# EAGLE board Control Card Layout #6 (EAGLE 7.6.0)
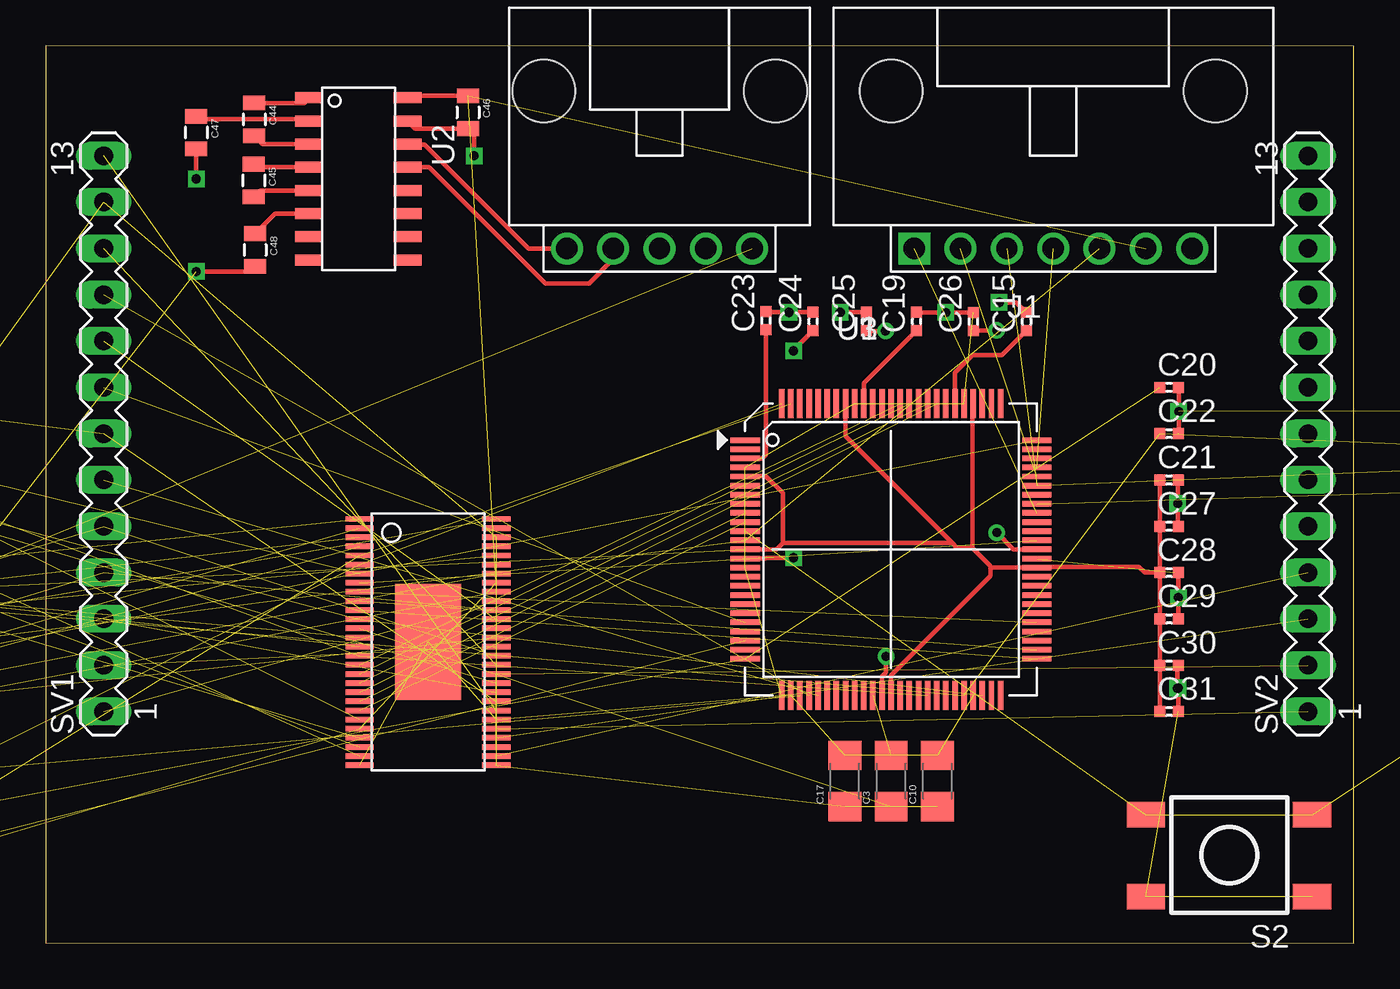
[diagram p0: board, top side]
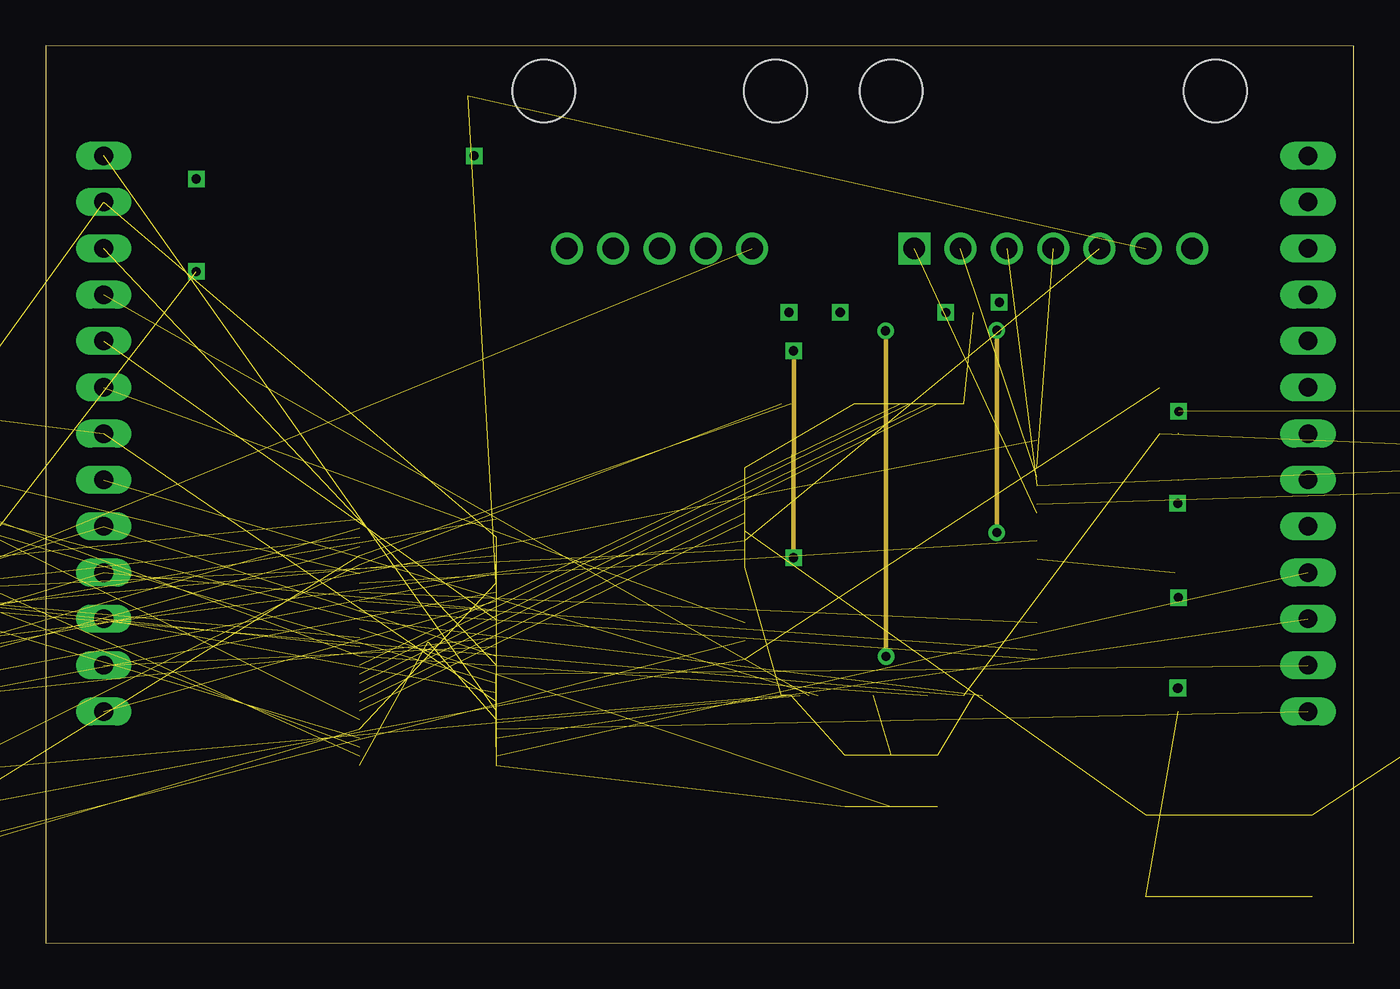
[diagram p1: board, inner layer Top_Mid]
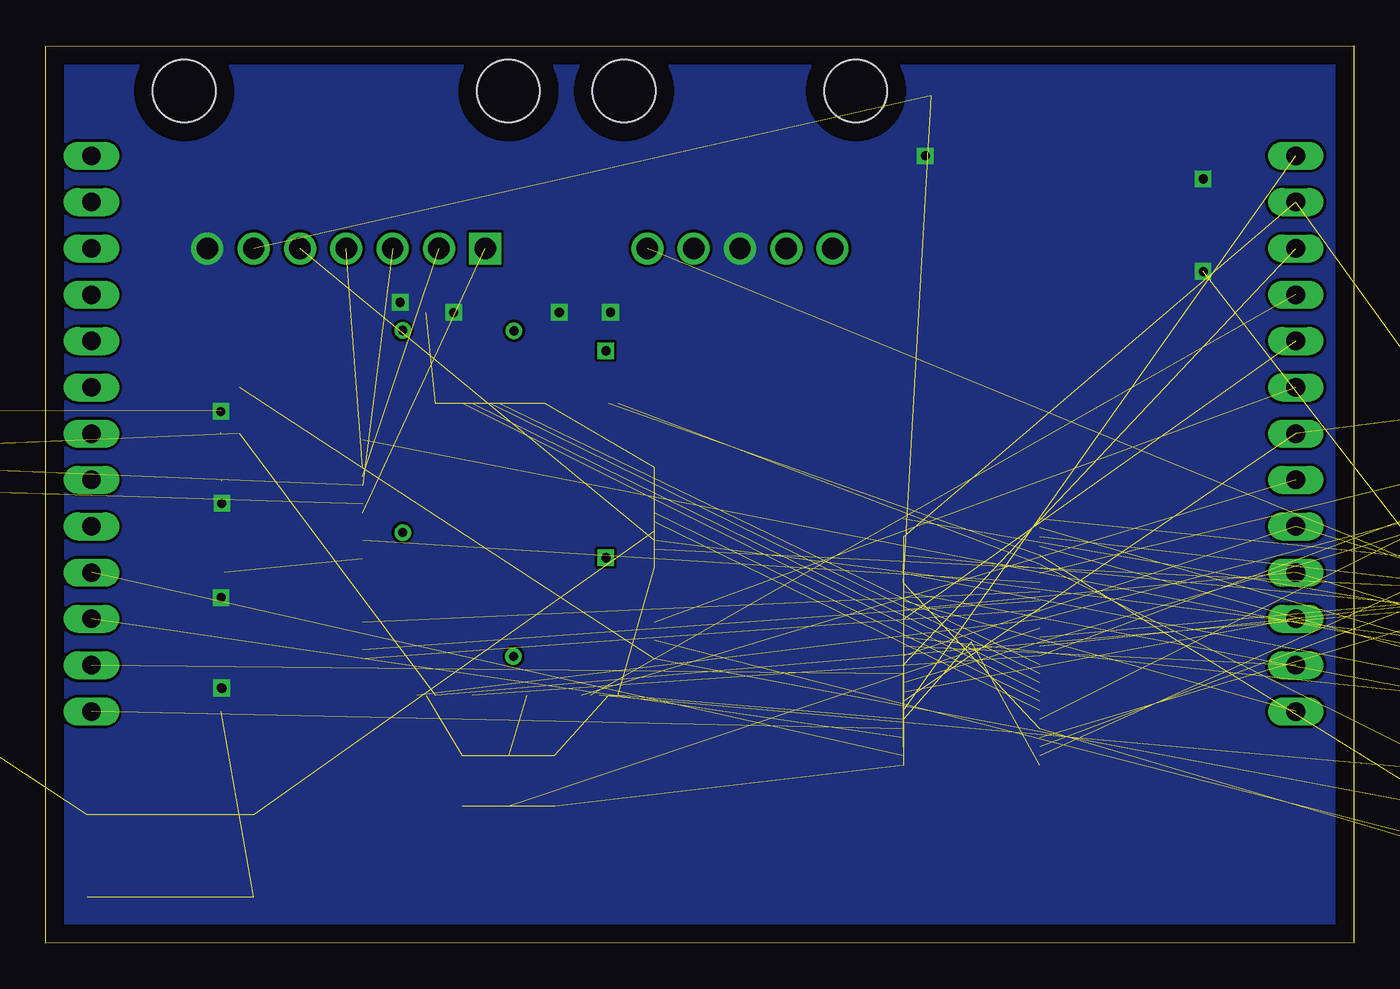
[diagram p2: board, bottom side, seen from below]

Size 71.75 x 49.23 mm. Coordinates in mm from the lower left corner, seen from the top.
Outline: 0,0.02 71.75,0 71.75,49.2 0,49.23 0,0.02
Copper layers (1*2*15*16): Top 0.035mm / dielectric 1.5mm / Top_Mid 0.035mm / dielectric 0.15mm / Bottom_Mid 0.035mm / dielectric 0.2mm / Bottom 0.035mm
Design rules "advanced_circuits_standard *": minimum track width 5mil, minimum drill 10mil, track to track 5mil, track to pad 5mil, pad to pad 5mil, via to via 5mil, smd to smd 5mil, copper to edge 40mil, drill to drill 5mil, minimum pad ring 10mil, minimum via ring 8mil, stop-mask expansion 4mil, vias tented up to drill 0mil, thermal gap 10mil
Net classes: 0 default: width 0.152 mm, drill 0.305 mm, clearance 0.152 mm

## Footprints (pad centres in the part's own frame; a part is rotated, then mirrored left to right if it is on the bottom)
0805 = smd 0.8 x 1.2: 1 -0.9,0; 2 0.9,0
1206 = smd 1.6 x 1.8: 1 -1.4,0; 2 1.4,0
C0402 = smd 0.6 x 0.6: 1 -0.5,0; 2 0.5,0
CPOL-RADIAL-100UF-25V = drill 0.7 pad 1.651 square: 1 1.27,0 | drill 0.7 pad 1.651: 2 -1.27,0
SMB-DIODE = smd 2.4 x 2.4: A 2.2,0; C -2.2,0
LED-1206 = smd 1.2 x 1.4: A -1.5,0; C 1.5,0
MOLEX-70551-0006 = drill 1.168 square: 1 -7.62,0 | drill 1.168: 2 -5.08,0; 3 -2.54,0; 4 0,0; 5 2.54,0; 6 5.08,0; 7 7.62,0 | hole 3.454: -8.89,8.636; 8.89,8.636
R0402 = smd 0.6 x 0.6: 1 -0.5,0; 2 0.5,0
SOT23-3 = smd 0.8 x 0.9: 1 -0.95,-1; 2 0.95,-1; 3 0,1.1
FSMJSMA = smd 1.397 x 2.108: P$1 0,0; P$2 0,-9.119; P$3 4.496,0; P$4 4.496,-9.119
MA13-1 = drill 1.016 long: 1 -15.24,0; 2 -12.7,0; 3 -10.16,0; 4 -7.62,0; 5 -5.08,0; 6 -2.54,0; 7 0,0; 8 2.54,0; 9 5.08,0; 10 7.62,0; 11 10.16,0; 12 12.7,0; 13 15.24,0
TESTPAD_B1,27 = smd 1.27 x 1.27: TP 0,0
PQFP100 = smd 1.6 x 0.3: 1 -8,6; 2 -8,5.5; 3 -8,5; 4 -8,4.5; 5 -8,4; 6 -8,3.5; 7 -8,3; 8 -8,2.5; 9 -8,2; 10 -8,1.5; 11 -8,1; 12 -8,0.5; 13 -8,0; 14 -8,-0.5; 15 -8,-1; 16 -8,-1.5; 17 -8,-2; 18 -8,-2.5; 19 -8,-3; 20 -8,-3.5; 21 -8,-4; 22 -8,-4.5; 23 -8,-5; 24 -8,-5.5; 25 -8,-6; 51 8,-6; 52 8,-5.5; 53 8,-5; 54 8,-4.5; 55 8,-4; 56 8,-3.5; 57 8,-3; 58 8,-2.5; 59 8,-2; 60 8,-1.5; 61 8,-1; 62 8,-0.5; 63 8,0; 64 8,0.5; 65 8,1; 66 8,1.5; 67 8,2; 68 8,2.5; 69 8,3; 70 8,3.5; 71 8,4; 72 8,4.5; 73 8,5; 74 8,5.5; 75 8,6 | smd 0.3 x 1.6: 26 -6,-8; 27 -5.5,-8; 28 -5,-8; 29 -4.5,-8; 30 -4,-8; 31 -3.5,-8; 32 -3,-8; 33 -2.5,-8; 34 -2,-8; 35 -1.5,-8; 36 -1,-8; 37 -0.5,-8; 38 0,-8; 39 0.5,-8; 40 1,-8; 41 1.5,-8; 42 2,-8; 43 2.5,-8; 44 3,-8; 45 3.5,-8; 46 4,-8; 47 4.5,-8; 48 5,-8; 49 5.5,-8; 50 6,-8; 76 6,8; 77 5.5,8; 78 5,8; 79 4.5,8; 80 4,8; 81 3.5,8; 82 3,8; 83 2.5,8; 84 2,8; 85 1.5,8; 86 1,8; 87 0.5,8; 88 0,8; 89 -0.5,8; 90 -1,8; 91 -1.5,8; 92 -2,8; 93 -2.5,8; 94 -3,8; 95 -3.5,8; 96 -4,8; 97 -4.5,8; 98 -5,8; 99 -5.5,8; 100 -6,8
SOIC16 = smd 0.6 x 1.55: 1 -4.445,-2.7; 2 -3.175,-2.7; 3 -1.905,-2.7; 4 -0.635,-2.7; 5 0.635,-2.7; 6 1.905,-2.7; 7 3.175,-2.7; 8 4.445,-2.7; 9 4.445,2.7; 10 3.175,2.7; 11 1.905,2.7; 12 0.635,2.7; 13 -0.635,2.7; 14 -1.905,2.7; 15 -3.175,2.7; 16 -4.445,2.7
DCA = smd 0.3 x 1.55: 1 -6.75,-3.75; 2 -6.25,-3.75; 3 -5.75,-3.75; 4 -5.25,-3.75; 5 -4.75,-3.75; 6 -4.25,-3.75; 7 -3.75,-3.75; 8 -3.25,-3.75; 9 -2.75,-3.75; 10 -2.25,-3.75; 11 -1.75,-3.75; 12 -1.25,-3.75; 13 -0.75,-3.75; 14 -0.25,-3.75; 15 0.25,-3.75; 16 0.75,-3.75; 17 1.25,-3.75; 18 1.75,-3.75; 19 2.25,-3.75; 20 2.75,-3.75; 21 3.25,-3.75; 22 3.75,-3.75; 23 4.25,-3.75; 24 4.75,-3.75; 25 5.25,-3.75; 26 5.75,-3.75; 27 6.25,-3.75; 28 6.75,-3.75; 29 6.75,3.75; 30 6.25,3.75; 31 5.75,3.75; 32 5.25,3.75; 33 4.75,3.75; 34 4.25,3.75; 35 3.75,3.75; 36 3.25,3.75; 37 2.75,3.75; 38 2.25,3.75; 39 1.75,3.75; 40 1.25,3.75; 41 0.75,3.75; 42 0.25,3.75; 43 -0.25,3.75; 44 -0.75,3.75; 45 -1.25,3.75; 46 -1.75,3.75; 47 -2.25,3.75; 48 -2.75,3.75; 49 -3.25,3.75; 50 -3.75,3.75; 51 -4.25,3.75; 52 -4.75,3.75; 53 -5.25,3.75; 54 -5.75,3.75; 55 -6.25,3.75; 56 -6.75,3.75 | smd 6.35 x 3.61: P$2 0,0
5PIN = drill 1.168: 1 5.08,0; 2 2.54,0; 3 0,0; 4 -2.54,0; 5 -5.08,0 | hole 3.454: -6.35,8.636; 6.35,8.636
TEST_POINT_0.1INDIAM = drill 1.016: P$1 0,0
INDUCTOR_DR74 = smd 2.5 x 3.25: P$1 -3,0; P$2 3,0

## Placement (x,y rotation side)
C1  6800p  [0805]  -20.94,15.24 0 top  (outside the outline)
C2  120p  [0805]  -24.75,13.97 0 top  (outside the outline)
C3  2.2u  [1206]  46.37,8.89 90 top
C4  .022u  [0805]  -20.94,20.32 0 top  (outside the outline)
C5  1u  [0805]  -20.94,31.75 0 top  (outside the outline)
C6  2200p  [0805]  -5.7,5.08 0 top  (outside the outline)
C7  2200p  [0805]  -12.05,8.89 180 top  (outside the outline)
C8  1u  [0805]  -20.94,27.94 0 top  (outside the outline)
C9  0.1u  [0805]  -13.32,16.51 0 top  (outside the outline)
C10  4.7u  [1206]  48.91,8.89 90 top
C11  0.1u  [0805]  -37.45,33.02 0 top  (outside the outline)
C12  0.1u  [0805]  -37.45,10.16 180 top  (outside the outline)
C13  0.1u  [0805]  -37.45,7.62 180 top  (outside the outline)
C14  0.1u  [0805]  -37.45,15.24 0 top  (outside the outline)
C15  2.2u  [C0402]  53.8,34.09 90 top
C16  0.015u  [0805]  -37.45,12.7 180 top  (outside the outline)
C17  4.7u  [1206]  43.83,8.89 90 top
C18  0.1u  [0805]  -34.91,39.37 0 top  (outside the outline)
C19  2.2u  [C0402]  47.76,34.1 90 top
C20  2.2u  [C0402]  61.61,30.48 0 top
C21  2.2u  [C0402]  61.61,25.4 0 top
C22  2.2u  [C0402]  61.61,27.94 0 top
C23  2.2u  [C0402]  39.51,34.14 90 top
C24  2.2u  [C0402]  42.09,34.1 90 top
C25  2.2u  [C0402]  45.02,34.1 90 top
C26  2.2u  [C0402]  50.88,34.09 90 top
C27  2.2u  [C0402]  61.61,22.86 0 top
C28  2.2u  [C0402]  61.61,20.32 0 top
C29  2.2u  [C0402]  61.61,17.78 0 top
C30  2.2u  [C0402]  61.61,15.24 0 top
C31  2.2u  [C0402]  61.61,12.7 0 top
C32  1u  [0805]  -24.75,21.59 0 top  (outside the outline)
C33  0.1u  [0805]  -24.75,24.13 0 top  (outside the outline)
C34  0.1u  [C0402]  -20.94,12.7 0 top  (outside the outline)
C36  47u  [CPOL-RADIAL-100UF-25V]  -27.29,6.35 0 top  (outside the outline)
C39  0.1u  [C0402]  92.09,24.13 0 top  (outside the outline)
C40  .015u  [0805]  -28.56,15.24 0 top  (outside the outline)
C44  0.1u  [0805]  11.44,45.17 270 top
C45  0.1u  [0805]  11.42,41.82 270 top
C46  0.1u  [0805]  23.16,45.57 270 top
C47  0.1u  [0805]  8.27,44.45 270 top
C48  0.1u  [0805]  11.49,38.01 270 top
D1  DIODE-ZENERSMB  [SMB-DIODE]  -32.37,11.43 90 top  (outside the outline)
D7  [LED-1206]  -27.29,-1.27 0 top  (outside the outline)
D8  [LED-1206]  -13.32,41.91 270 top  (outside the outline)
D9  [LED-1206]  -27.29,1.27 0 top  (outside the outline)
J1  SL07-HORIZ  [MOLEX-70551-0006]  55.26,38.1 0 top
L3  BKP1005HS221-T  [R0402]  -17.13,6.35 0 top  (outside the outline)
L4  BLM15PD600SN1D  [R0402]  -13.32,19.05 0 top  (outside the outline)
Q7  MOSFET-PCHANNEL  [SOT23-3]  -18.4,43.18 0 top  (outside the outline)
Q8  MOSFET-PCHANNEL  [SOT23-3]  -9.51,5.08 0 top  (outside the outline)
R1  205k  [0805]  -24.75,19.05 0 top  (outside the outline)
R2  16.2k  [0805]  -12.05,13.97 0 top  (outside the outline)
R3  31.6k  [0805]  -24.75,26.67 0 top  (outside the outline)
R4  10k  [0805]  -20.94,17.78 180 top  (outside the outline)
R5  10k  [0805]  -23.48,10.16 0 top  (outside the outline)
R6  10k  [0805]  -24.75,16.51 0 top  (outside the outline)
R7  10k  [0805]  -13.32,5.08 0 top  (outside the outline)
R8  150k  [0805]  -33.64,33.02 0 top  (outside the outline)
R9  56  [0805]  -20.94,22.86 0 top  (outside the outline)
R10  56  [0805]  -20.94,25.4 0 top  (outside the outline)
R11  2.2k  [R0402]  92.09,21.59 0 top  (outside the outline)
R12  2.2k  [R0402]  95.9,25.4 0 top  (outside the outline)
R14  2.2k  [R0402]  92.09,29.21 0 top  (outside the outline)
R15  820  [R0402]  97.17,22.86 0 top  (outside the outline)
R16  820  [R0402]  92.09,26.67 180 top  (outside the outline)
R17  2.2k  [R0402]  -15.86,15.24 0 top  (outside the outline)
R28  1k  [0805]  -24.75,31.75 0 top  (outside the outline)
R29  1k  [0805]  -24.75,29.21 0 top  (outside the outline)
R31  100  [0805]  -27.29,11.43 0 top  (outside the outline)
R33  330  [0805]  -4.43,21.59 0 top  (outside the outline)
R34  330  [0805]  -13.32,24.13 0 top  (outside the outline)
R35  330  [0805]  -32.37,1.27 180 top  (outside the outline)
S2  TP-1138K9-BE1125  [FSMJSMA]  60.34,2.54 90 top
SV1  [MA13-1]  3.19,27.94 90 top
SV2  [MA13-1]  69.23,27.94 90 top
TP19  TESTPAD_TPB1,27  [TESTPAD_B1,27]  -17.13,5.08 0 top  (outside the outline)
U1  TMS320F28069MPZT  [PQFP100]  46.37,21.59 0 top
U2  MAX3232D  [SOIC16]  17.16,41.91 270 top
U3  TMS320F28069MPZT  [PQFP100]  46.37,21.59 0 top
U$1  DRV8301  [DCA]  20.97,16.51 270 top
U$4  5PIN  [5PIN]  33.67,38.1 0 top
U$10  TEST_POINT_0.1INDIAM  [TEST_POINT_0.1INDIAM]  -17.13,39.37 0 top  (outside the outline)
U$14  33u  [INDUCTOR_DR74]  -38.72,1.27 0 top  (outside the outline)

## Library data of the parts
C1-C14 C16-C18 C32 C33 C36 C40 C44-C48 R1-R10 R28 R29 R31 R33-R35 = SparkFun-Passives
C15 C19-C31 C34 C39 L3 L4 R11 R12 R14-R17 = rcl
D1 = SparkFun-DiscreteSemi
D7-D9 = SparkFun-LED
J1 U$10 = MRDT-Connectors
Q7 Q8 = SparkFun-DiscreteSemi; PROD_ID: TRANS-08285
S2 = switch
SV1 SV2 = con-lstb; OC_FARNELL: unknown; OC_NEWARK: unknown
TP19 = RF430FRL152H_EVM_a
U1 U3 = LAUNCHXL-F28027
U2 = MRDT-ICs; OPERATING_VOLTAGE: 3V3
U$1 = DRV8301
U$4 = Molex-SL
U$14 = Inductor_DR74

## Nets
232_RX: U2.13 U$4.4
232_TX: U2.14 U$4.5
+3V3: C22.1 C34.1 L3.2 L4.2 R11.2 R15.2 R16.2 U1.46
ASENSE: SV1.10 U1.29
BSENSE: SV1.8 U1.21
CSENSE: SV1.6 U1.30
DC_CAL: R29.1 U3.48 U$1.12
EN_GATE: R28.1 U3.42 U$1.16
GH_A: SV1.1 U$1.47
GH_B: SV1.2 U$1.42
GH_C: SV1.3 U$1.37
GL_A: SV1.9 U$1.45
GL_B: SV1.11 U$1.40
GL_C: SV1.13 U$1.35
GND: C1.2 C2.1 C3.2 C5.2 C6.2 C7.2 C8.2 C9.2 C10.2 C15.2 C16.2 C17.2 C18.1 C19.2 C20.2 C21.2 C22.2 C23.2 C24.2 C25.2 C26.2 C27.2 C28.2 C29.2 C30.2 C31.2 C32.1 C33.1 C34.2 C36.2 C39.2 C40.2 C46.2 C47.2 C48.2 D1.A J1.7 R1.1 R4.1 R8.2 R12.1 R14.1 R17.1 R28.2 R29.2 R33.2 R34.2 R35.2 S2.P$1 S2.P$2 U1.4 U1.15 U1.26 U1.27 U1.36 U1.47 U1.62 U1.80 U1.90 U1.92 U2.15 U$1.28 U$1.34 U$1.P$2 U$4.3
GPIO34: R12.2 R15.1 U3.68
INH_A: U3.87 U$1.17
INH_B: U3.84 U$1.19
INH_C: U3.9 U$1.21
INL_A: U3.86 U$1.18
INL_B: U3.83 U$1.20
INL_C: U3.10 U$1.22
N$1: C2.2 R2.1 U$1.2
N$2: C1.1 R2.2
N$3: R3.1 R4.2 U$1.3
N$4: R1.2 U$1.1
N$5: R8.1 U$1.7
N$6: C4.1 U$1.14
N$7: C4.2 U$1.15
N$8: C3.1 U$1.13
N$9: C5.1 U$1.23
N$10: R9.1 U$1.25
N$11: R10.1 U$1.26
N$12: C8.1 U$1.27
N$13: C23.1 U1.3
N$14: C24.1 U1.14
N$15: C25.1 U1.37
N$16: C26.1 U1.63
N$17: C15.1 U1.81
N$21: C11.1 U$1.38
N$24: D7.C R33.1
N$25: C12.1 U$1.43
N$26: D8.C R34.1
N$27: D9.C R35.1
N$28: D9.A Q8.3
N$29: C13.1 U$1.48
N$30: C14.1 U$1.52
N$31: C14.2 D1.C U$1.50 U$1.51 U$14.P$1
N$32: D8.A Q7.3
N$34: R31.2 U$4.1
N$35: C16.1 U$1.56
N$36: C19.1 U1.91
N$40: C44.1 U2.1
N$42: C44.2 U2.3
N$43: C45.1 U2.4
N$44: C45.2 U2.5
N$45: C48.1 U2.6
N$46: C47.1 U2.2
NFAULT: Q7.1 R7.1 U3.100 U$1.6
NOCTW: Q8.1 R6.1 U3.99 U$1.5
NSCS: U1.64 U$1.8
PVDD: C9.1 C10.1 C17.1 C18.2 SV1.12 U$1.29 U$1.53 U$1.54
PVDDSENSE: U1.16
PWM_IN: C40.1 R31.1 U3.75
PWRGD: R5.1 U$1.4
RESET#: C39.1 R11.1 S2.P$3 S2.P$4 U1.11
SCLK: U1.51 U$1.11
SDI: U3.55 U$1.9
SDO: U3.52 U$1.10
SH_A: C13.2 SV1.4 U$1.46
SH_B: C12.2 SV1.5 U$1.41
SH_C: C11.2 SV1.7 U$1.36
SL_A: SV2.1 U$1.33 U$1.44
SL_B: SV2.2 U$1.31 U$1.39
SO1: C6.1 R9.2 U1.23
SO2: C7.1 R10.2 U1.28
SP1: SV2.3 U$1.32
SP2: SV2.4 U$1.30
TCK: J1.1 U1.67
TDI: J1.2 U1.71
TDO: J1.3 R14.2 R16.1 U1.70
TMS: J1.4 U1.72
TRST: J1.5 R17.2 U1.12
UART_RX: U2.12
UART_TX: U2.11
VART_RX: U3.50
VART_TX: U3.43
VCC: C32.2 C33.2 C36.1 C46.1 D7.A J1.6 Q7.2 Q8.2 R3.2 R5.2 R6.2 R7.2 U2.16 U$1.24 U$1.49 U$10.P$1 U$14.P$2
VDD1: U3.3
VDD2: U3.14
VDD3: U3.37
VDD4: U3.63
VDD5: U3.81
VDD6: U3.91
VDD_FL: U3.46
VDDA: C20.1 L3.1 TP19.TP U1.25 U3.25
VDDIO: C21.1 C27.1 C28.1 C29.1 C30.1 C31.1 L4.1 U1.5 U1.13 U1.38 U1.61 U1.79 U1.93
VDDIO1: U3.5
VDDIO2: U3.13
VDDIO3: U3.38
VDDIO4: U3.61
VDDIO5: U3.79
VDDIO6: U3.93
VSS1: U3.4
VSS2: U3.15
VSS3: U3.36
VSS4: U3.47
VSS5: U3.62
VSS6: U3.80
VSS7: U3.92
VSSA: U3.26

## Tracks (layer width: path | path; a pad name or v marks a point on that pad's centre or on a via)
232_RX
  Top 0.254: U2.13 19.87,42.56 21.02,42.56 27.41,36.17 29.79,36.17 31.13,37.5 U$4.4
232_TX
  Top 0.254: U2.14 19.87,43.8 20.78,43.8 26.48,38.1 U$4.5
+3V3  (7 unrouted)
ASENSE  (1 unrouted)
BSENSE  (1 unrouted)
CSENSE  (1 unrouted)
DC_CAL  (2 unrouted)
EN_GATE  (2 unrouted)
GH_A  (1 unrouted)
GH_B  (1 unrouted)
GH_C  (1 unrouted)
GL_A  (1 unrouted)
GL_B  (1 unrouted)
GL_C  (1 unrouted)
GND  (via drill 0.5)  (47 unrouted)
  Top 0.254: C48.2 11.21,36.83 v8.27,36.83 | C47.2 v8.27,41.91 | v23.51,43.18 23.51,44.32 C46.2 20.27,44.67 U2.15 | C23.2 39.55,34.59 v40.77,34.59 v40.77,34.6 C24.2 | v43.57,34.59 v43.58,34.6 C25.2 | C19.2 47.78,34.58 v49.36,34.58 C26.2 | C15.2 53.25,35.14 v52.3,35.14 | C20.2 62.14,30.45 v62.14,29.16 62.14,27.97 | C27.2 62.09,22.88 v62.09,24.12 62.09,25.38 | C29.2 62.13,17.8 v62.13,18.95 62.13,20.3 C28.2 61.94,20.32 | C30.2 62.08,15.21 v62.08,13.97 | v62.1,13.99 v62.11,13.99 C31.2 | U1.62 54.4,21.06
  Bottom 0.254: v62.09,24.12 v62.08,24.13 | v62.14,29.16 62.15,29.17 | v62.13,18.95 62.14,18.96 | v62.08,13.97 v62.1,13.99
  pour Bottom (no thermals): -1.89,54.61 75.58,54.61 75.58,-1.27 -1.89,-1.27
GPIO34  (2 unrouted)
INH_A  (1 unrouted)
INH_B  (1 unrouted)
INH_C  (1 unrouted)
INL_A  (1 unrouted)
INL_B  (1 unrouted)
INL_C  (1 unrouted)
N$1  (2 unrouted)
N$2  (1 unrouted)
N$3  (2 unrouted)
N$4  (1 unrouted)
N$5  (1 unrouted)
N$6  (1 unrouted)
N$7  (1 unrouted)
N$8  (1 unrouted)
N$9  (1 unrouted)
N$10  (1 unrouted)
N$11  (1 unrouted)
N$12  (1 unrouted)
N$13
  Top 0.254: U1.3 39.28,26.58 39.51,26.81 C23.1
N$14  (via drill 0.5)
  Top 0.254: U1.14 39.45,21.09 39.5,21.13 v41.02,21.13 | C24.1 41.02,32.53 v41.02,32.49
  Top_Mid 0.254: v41.02,32.49 41.05,32.51 41.06,32.51 41.03,32.49 v41.02,21.13
N$15  (via drill 0.5)
  Top 0.254: C25.1 45.04,33.58 v46.06,33.58 | v46.09,15.72 46.09,14.83 45.87,14.61 U1.37
  Top_Mid 0.254: v46.06,33.58 46.09,33.55 v46.09,15.72
N$16  (via drill 0.5)
  Top 0.254: C26.1 50.89,33.6 v52.16,33.6 | v52.16,22.52 53.09,21.59 U1.63
  Top_Mid 0.254: v52.16,33.6 v52.16,22.52
N$17
  Top 0.254: C15.1 52.45,32.24 50.83,32.24 49.87,31.29 U1.81
N$21  (1 unrouted)
N$24  (1 unrouted)
N$25  (1 unrouted)
N$26  (1 unrouted)
N$27  (1 unrouted)
N$28  (1 unrouted)
N$29  (1 unrouted)
N$30  (1 unrouted)
N$31  (4 unrouted)
N$32  (1 unrouted)
N$34  (1 unrouted)
N$35  (1 unrouted)
N$36
  Top 0.254: C19.1 44.87,30.7 U1.91
N$40
  Top 0.254: U2.1 14.18,46.07 C44.1
N$42
  Top 0.254: C44.2 11.9,43.82 U2.3
N$43
  Top 0.254: C45.1 11.59,42.54 U2.4
N$44
  Top 0.254: C45.2 11.77,41.27 U2.5
N$45
  Top 0.254: C48.1 12.59,40.01 U2.6
N$46
  Top 0.254: U2.2 14.36,45.19 7.78,45.19 7.9,45.3 C47.1
NFAULT  (3 unrouted)
NOCTW  (3 unrouted)
NSCS  (1 unrouted)
PVDD  (7 unrouted)
PWM_IN  (2 unrouted)
PWRGD  (1 unrouted)
RESET#  (4 unrouted)
SCLK  (1 unrouted)
SDI  (1 unrouted)
SDO  (1 unrouted)
SH_A  (2 unrouted)
SH_B  (2 unrouted)
SH_C  (2 unrouted)
SL_A  (2 unrouted)
SL_B  (2 unrouted)
SO1  (2 unrouted)
SO2  (2 unrouted)
SP1  (1 unrouted)
SP2  (1 unrouted)
TCK  (1 unrouted)
TDI  (1 unrouted)
TDO  (3 unrouted)
TMS  (1 unrouted)
TRST  (2 unrouted)
VCC  (15 unrouted)
  Top 0.254: U2.16 19.97,46.47 C46.1
VDDA  (3 unrouted)
VDDIO  (1 unrouted)
  Top 0.254: 61.07,22.82 C27.1 C21.1 | C28.1 60.27,20.32 59.96,20.64 54.41,20.64 U1.61 51.93,20.59 51.82,20.7 | 61.07,22.82 61.03,22.86 | 61.07,22.82 61.11,22.78 C28.1 | C28.1 C29.1 C30.1 C31.1 | U1.79 50.84,29.56 50.84,21.68 | 50.84,21.68 51.82,20.7 | U1.38 arc60 46.37,13.97 46.35,13.98 46.35,14.68 51.82,20.15 51.82,20.7 | U1.93 43.87,27.8 49.72,21.95 | 49.72,21.95 49.99,21.68 50.84,21.68 | U1.13 40.07,21.59 40.42,21.95 | 40.42,21.95 49.72,21.95 | U1.5 38.39,25.62 39.48,25.62 40.42,24.68 40.42,21.95